# Altium PCB MACH LOC NUOC KAROFI V3 271015.PcbDoc (part 2 of 2)
Units mil, origin at the board's own origin, x right, y up, seen from the top; angles counter-clockwise.
Board outline 2986 x 2286 mil, 2 copper layers (Top Layer, Bottom Layer); 83 components, 86 nets, 303 pads, 107 vias.
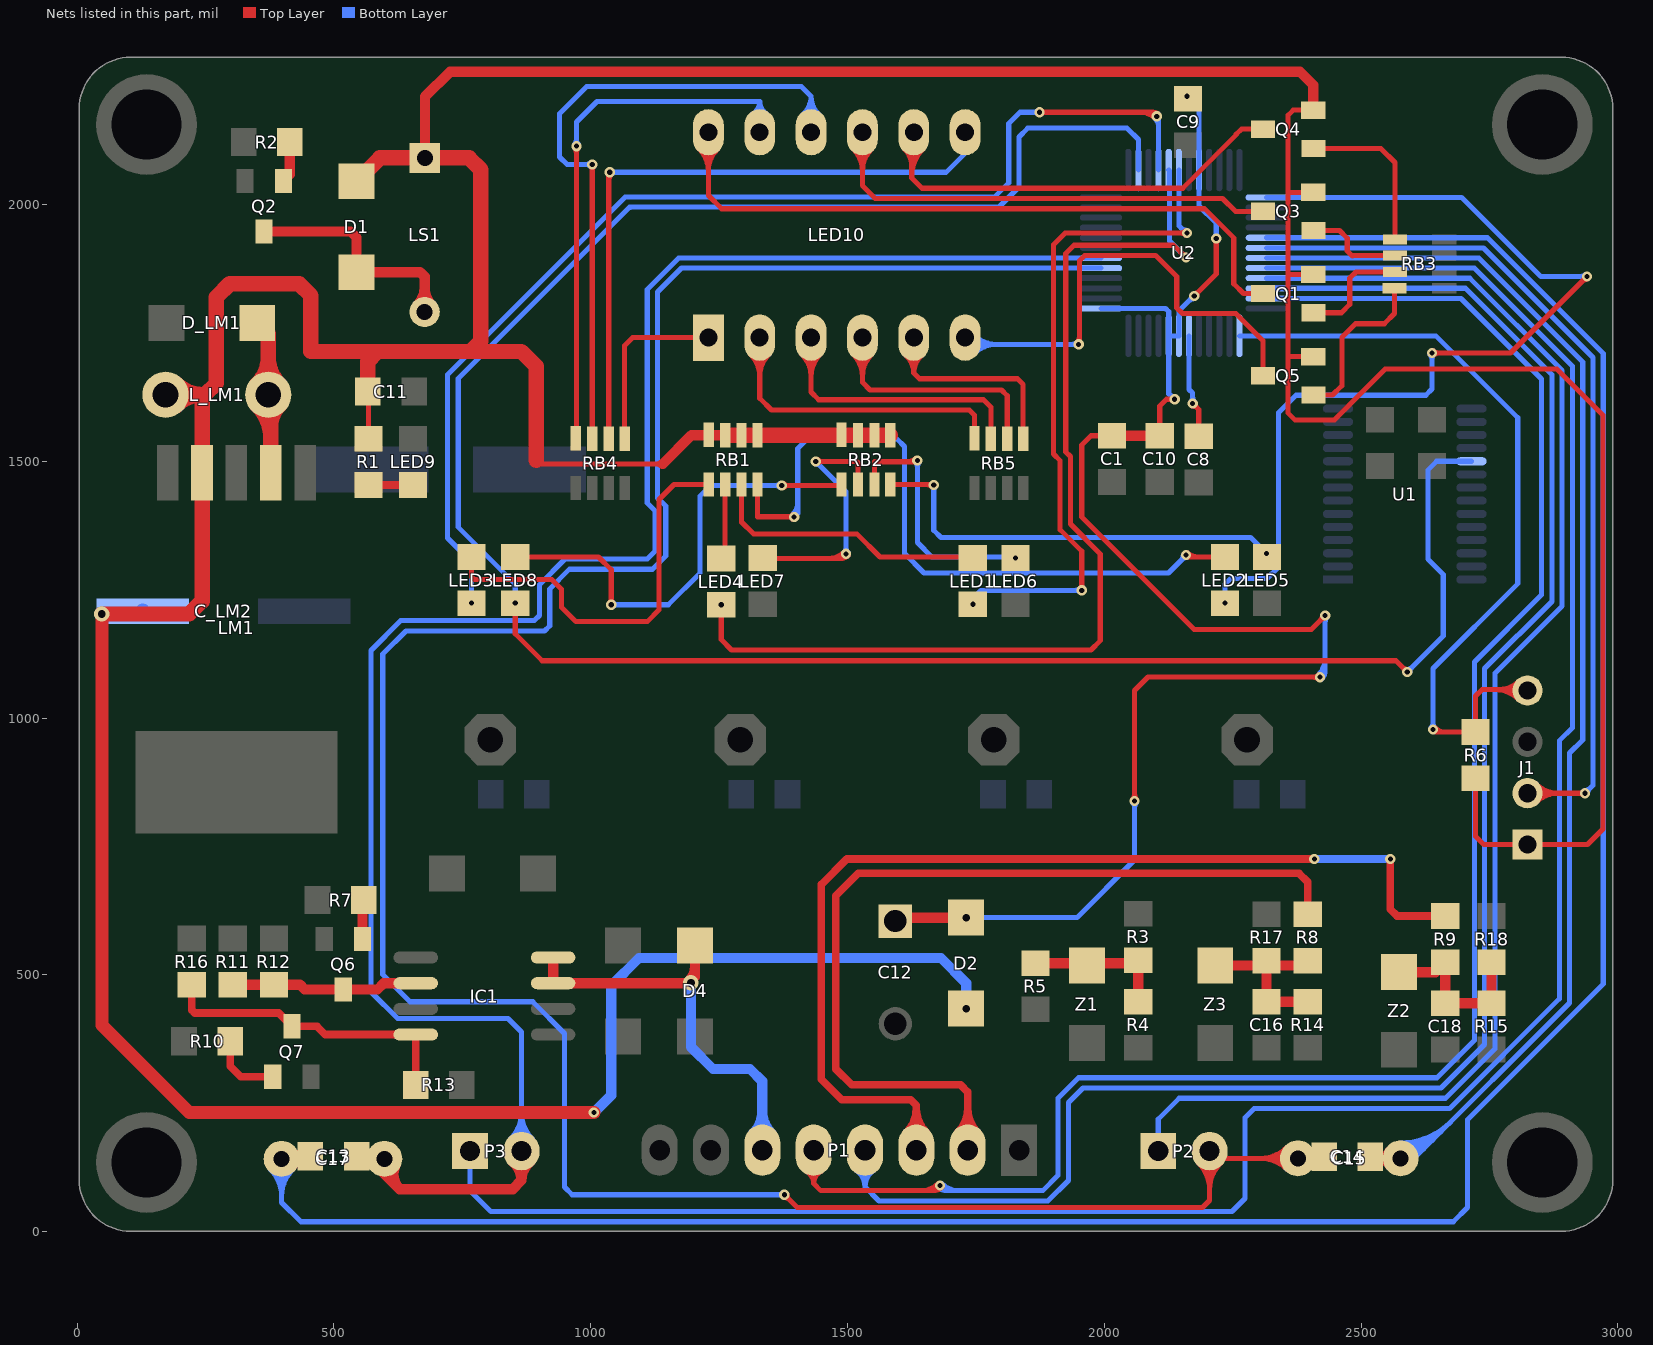
[diagram p2: the nets of this part, all layers, seen from the top]

## Via types
v1: diameter 20, hole 10, Top Layer to Bottom Layer, tented both sides, 92 vias
v2: diameter 30, hole 15, Top Layer to Bottom Layer, tented both sides, 15 vias

## Nets (pads, with @x,y where several pads share a name; then routed paths per layer and width w, separated by ;. In a path a pad name is that pad's centre, name@x,y a point inside that pad or via, vN(x,y) a via of type N, cw(c..) or ccw(c..) an arc to the next point about the centre after c; other vN are vias at no path point) (continued)
KEY4: LED8.2 U1.19 U2.26 | length 4565.5
  Top Layer w10: LED8.2@849.46,1220.46 cw(c840.93,1211.93) 853,1211.93 cw(c865.07,1211.93) LED8.2@856.54,1220.46 ; v1(853,1224) 853,1164.43 905.43,1112 2568,1112 v1(2590,1090) ; v1@2585,1090 ccw(c2572.93,1090) 2581.46,1098.54 ccw(c2590,1107.07) v1@2590,1095
  Bottom Layer w10: v1@849.46,1227.54 ccw(c840.93,1236.07) 853,1236.07 ccw(c865.07,1236.07) v1@856.54,1227.54 ; v1(853,1224) 853,1261 742,1372 742,1661.71 1075.29,1995 1076.92,1995 1077.14,1995.21 1794.78,1995.21 1834,2034.43 1834,2132 1851,2149 2044.42,2149 2066.42,2127 U2.26@2066.42,2067.42 ; v1(2590,1090) 2660,1160 2660,1280 2630,1310 2630,1430 2630,1483 2647.32,1500.32 U1.19@2714.84,1500.32 ; v1@2590,1095 ccw(c2590,1107.07) 2598.54,1098.54 ccw(c2607.07,1090) v1@2595,1090
LED1: Q1.1 RB3.3 | length 221.6
  Top Layer w10: Q1.1@2407.21,1789.6 2461.6,1789.6 2478,1806 2478,1857 2490,1869 RB3.3@2566,1869
LED2: Q3.1 RB3.2 | length 194.2
  Top Layer w10: Q3.1@2407.21,1949.6 2458,1949.6 2473,1934.6 2473,1910 2483,1900 2484,1901 RB3.2@2566,1901
LED3: Q4.1 RB3.1 | length 320.2
  Top Layer w10: Q4.1@2407.21,2109.6 2538.4,2109.6 2566,2082 RB3.1@2566,1932
LED4: Q5.1 RB3.4 | length 327.5
  Top Layer w10: Q5.1@2407.21,1629.6 2444.6,1629.6 2462.5,1647.5 2462.5,1741.5 2489,1768 2545,1768 2565,1788 RB3.4@2565,1837
MCU_L1: LED2.2 U2.37 | length 1989.7
  Top Layer w10: v1(2638,1711) 2791,1711 v1(2940,1860) ; v1@2641.54,1707.46 cw(c2650.07,1698.93) 2650.07,1711 cw(c2650.07,1723.07) v1@2641.54,1714.54 ; v1@2935,1860 cw(c2922.93,1860) 2931.46,1851.46 cw(c2940,1842.93) v1@2940,1855
  Bottom Layer w10: v1@2231.46,1227.54 ccw(c2222.93,1236.07) 2235,1236.07 ccw(c2247.07,1236.07) v1@2238.54,1227.54 ; v1(2235,1224) 2235,1261 2246,1272 2317,1272 2339,1294 2339,1595 2373,1629 2626,1629 2638,1641 v1(2638,1711) ; U2.37@2316.42,2014.27 2695.73,2014.27 2850,1860 v1(2940,1860) ; v1@2634.46,1707.46 cw(c2625.93,1698.93) 2638,1698.93 cw(c2650.07,1698.93) v1@2641.54,1707.46 ; v1@2936.46,1856.46 ccw(c2927.93,1847.93) 2927.93,1860 ccw(c2927.93,1872.07) v1@2936.46,1863.54
MCU_L2: LED1.2 U2.30 | length 1439.3
  Top Layer w10: v1@1952.46,1252.54 ccw(c1943.93,1261.07) 1956,1261.07 ccw(c1968.07,1261.07) v1@1959.54,1252.54 ; v1(1956,1249) 1956,1325 1914,1367 1914,1501.28 1901,1514.28 1901,1922 1924,1945 v1(2161,1945) ; v1@2157.46,1941.46 ccw(c2148.93,1932.93) 2148.93,1945 ccw(c2148.93,1957.07) v1@2157.46,1948.54
  Bottom Layer w10: v1@1739,1221.95 cw(c1753.25,1222.1) 1743.17,1232.17 ; v1(1744,1222) 1744,1233 1760,1249 ; v1@1749,1222.05 cw(c1786.56,1222.44) 1760,1249 ; v1@1952.46,1245.46 ccw(c1943.93,1236.93) 1943.93,1249 ccw(c1943.93,1261.07) v1@1952.46,1252.54 ; v1(1956,1249) 1760,1249 ; U2.30@2145.16,2067.42 2145.16,1958.84 2161,1943 v1(2161,1945) ; 2149.05,1954.95 ccw(c2161,1966.9) v1@2161,1950
MCU_L3: LED4.2 U2.29 | length 2095.2
  Top Layer w10: LED4.2@1250.46,1217.46 cw(c1241.93,1208.93) 1254,1208.93 cw(c1266.07,1208.93) LED4.2@1257.54,1217.46 ; v1(1254,1221) 1254,1153 1274,1133 1974,1133 1992,1151 1992,1320 1934,1378 1934,1509.57 1925,1518.57 1925,1905 1941,1921 2135,1921 v1(2159,1897) ; v1@2154,1897 ccw(c2141.93,1897) 2150.46,1905.54 ccw(c2159,1914.07) v1@2159,1902
  Bottom Layer w10: U2.29@2125.47,2067.42 2127,2065.89 2127,1929 v1(2159,1897) ; v1@2154,1897 ccw(c2141.93,1897) 2150.46,1905.54 ccw(c2159,1914.07) v1@2159,1902
MCU_L4: LED3.2 U2.28 | length 2353.5
  Top Layer w10: v1(1874,2180) 2094,2180 v1(2102,2172) ; v1@1877.54,2176.46 cw(c1886.07,2167.93) 1886.07,2180 cw(c1886.07,2192.07) v1@1877.54,2183.54 ; 2070.62,2180 cw(c2070.62,2140.62) v1@2098.46,2168.46 ; 2094.76,2180 cw(c2094.76,2164.76) v1@2105.54,2175.54
  Bottom Layer w10: v1@764.46,1227.54 ccw(c755.93,1236.07) 768,1236.07 ccw(c780.07,1236.07) v1@771.54,1227.54 ; v1(768,1224) 768,1304 721,1351 721,1668.99 1067.01,2015 1068.64,2015 1068.85,2015.21 1786.5,2015.21 1814,2042.72 1814,2158 1836,2180 v1(1874,2180) ; v1@1870.46,2176.46 ccw(c1861.93,2167.93) 1861.93,2180 ccw(c1861.93,2192.07) v1@1870.46,2183.54 ; v1@2098.46,2168.46 cw(c2080.79,2150.79) 2105.79,2150.79 ; v1(2102,2172) 2105.79,2168.21 U2.28@2105.79,2067.42
NetC8_2: C8.2 U2.6 | length 241.4
  Top Layer w10: v1@2172,1608 cw(c2172,1595.93) 2180.54,1604.46 cw(c2189.07,1613) v1@2177,1613 ; v1(2172,1613) 2184,1601 C8.2@2184,1549
  Bottom Layer w10: U2.6@2164.84,1744.58 2164.84,1640.16 2172,1633 v1(2172,1613) ; v1@2168.46,1616.54 ccw(c2159.93,1625.07) 2172,1625.07 ccw(c2184.07,1625.07) v1@2175.54,1616.54
NetC16_1: C16.1 R8.2 R14.1 R17.2 Z3.2 | length 330.6
  Top Layer w20: Z3.2@2216,518.58 R17.2@2316,518.58 ; R17.2@2316,528 R17.2@2316,518.58 ; R8.2@2386.58,518.58 R17.2@2316,518.58 ; R14.1@2396,448 C16.1@2316,448 R17.2@2316,518.58
NetC18_1: C18.1 R9.2 R15.1 R18.2 Z2.2 | length 320.6
  Top Layer w20: Z2.2@2574,505.58 R9.2@2644.58,505.58 ; R9.2@2664,525 C18.1@2664,445 R15.1@2754,445 R18.2@2754,525
NetD1_1: D1.1 LS1.2 Q2.2 | length 531.2
  Top Layer w20: Q2.2@364,1947.79 532.21,1947.79 544,1936 D1.1@544,1868.42 667.58,1868.42 676.5,1859.5 LS1.2@676.5,1791 ; LS1.2@662.69,1804.81 ccw(c629.36,1838.14) 676.5,1838.14 ccw(c723.64,1838.14) LS1.2@690.31,1804.81
NetD_LM1_2: D_LM1.2 L_LM1.1 LM1.2 | length 530.4
  Top Layer w30: D_LM1.2@350.58,1770 372,1748.58 L_LM1.1@372,1630 376.93,1625.07 LM1.2@376.93,1478 ; L_LM1.1@350.79,1608.79 cw(c287.67,1545.67) 376.93,1545.67 ; L_LM1.1@350.79,1651.21 ccw(c299.57,1702.43) 372,1702.43 ccw(c444.43,1702.43) L_LM1.1@393.21,1651.21 ; 376.93,1569.47 cw(c432.53,1569.47) L_LM1.1@393.21,1608.79
NetIC1_2: IC1.2 Q6.2 R11.2 R12.1 | length 365
  Top Layer w20: R11.2@303,481 R12.1@383,481 434,481 443.21,471.79 Q6.2@518,471.79 584.79,471.79 597,484 IC1.2@659.14,484
NetIC1_4: IC1.4 Q7.2 R13.1 R16.1 | length 602.9
  Top Layer w15: R16.1@223,481 223,432 229,426 392.21,426 Q7.2@418,400.21 466.79,400.21 483,384 IC1.4@659.14,384 ; R13.1@659,286 IC1.4@659,383.86
NetLED1_1: LED1.1 RB1.7 | length 552.7
  Top Layer w10: 1293.67,1381.33 RB1.7@1293.67,1455 ; 1295.67,1381.33 1294.67,1381.33 1317,1359 1518,1359 1563,1314 1742,1314 LED1.1@1744,1312
NetLED2_1: LED2.1 RB1.8 | length 1445.8
  Top Layer w10: RB1.8@1324.67,1455 1324.67,1392.33 1393.67,1392.33 1396,1390 v1(1396,1392) ; 1383.12,1392.33 cw(c1383.12,1379.12) v1@1392.46,1388.46 ; 1384.73,1392.33 ccw(c1384.73,1403.27) v1@1392.46,1395.54 ; v1(2159,1318) 2163,1314 LED2.1@2235,1314 ; v1@2162.54,1321.54 ccw(c2180.73,1339.73) 2180.73,1314
  Bottom Layer w10: v1@1392.46,1395.54 ccw(c1367.03,1420.97) 1403,1420.97 ; v1(1396,1392) 1403,1399 1403,1525 1422,1544 1596,1544 1611,1529 1611,1321 1649,1283 2125,1283 2159,1317 v1(2159,1318) ; 2149.76,1307.76 ccw(c2139.51,1318) v1@2154,1318 ; 2152.17,1310.17 cw(c2159,1303.34) v1@2159,1313
NetLED3_1: LED3.1 RB1.5 | length 793.7
  Top Layer w10: LED3.1@768,1314 768,1275 773,1270 924,1270 943,1251 943,1216 971,1188 1110,1188 1133,1211 1133,1426 1162,1455 RB1.5@1229.67,1455
NetLED4_1: LED4.1 RB1.6 | length 125.7
  Top Layer w10: LED4.1@1261.67,1329.33 RB1.6@1261.67,1455
NetLED5_1: LED5.1 RB2.8 | length 889.8
  Top Layer w10: RB2.8@1583.33,1455 1667,1455 v1(1668,1454) ; 1653.51,1455 cw(c1653.51,1439.51) v1@1664.46,1450.46
  Bottom Layer w10: v1@1664.46,1450.46 cw(c1655.93,1441.93) 1668,1441.93 cw(c1680.07,1441.93) v1@1671.54,1450.46 ; v1(1668,1454) 1668,1366 1682,1352 2285,1352 v1(2316,1321) ; v1@2311,1321 ccw(c2298.93,1321) 2307.46,1329.54 ccw(c2316,1338.07) v1@2316,1326
NetLED6_1: LED6.1 RB2.7 | length 543
  Top Layer w10: RB2.7@1552.33,1455 1552.33,1499.33 1633.33,1499.33 v1(1636,1502) ; 1617.49,1499.33 ccw(c1617.49,1520.51) v1@1632.46,1505.54
  Bottom Layer w10: v1@1632.46,1498.46 cw(c1623.93,1489.93) 1636,1489.93 cw(c1648.07,1489.93) v1@1639.54,1498.46 ; v1(1636,1502) 1636,1342 1664,1314 1825,1314 v1(1827,1312) ; 1810.1,1314 cw(c1810.1,1295.1) v1@1823.46,1308.46
NetLED7_1: LED7.1 RB2.6 | length 601.3
  Top Layer w10: LED7.1@1335,1311 1488,1311 v1(1497,1320) ; v1(1438,1500) 1518,1500 1520.33,1497.67 RB2.6@1520.33,1455 ; v1@1441.54,1496.46 cw(c1450.07,1487.93) 1450.07,1500 cw(c1450.07,1512.07) v1@1441.54,1503.54 ; 1463.2,1311 ccw(c1463.2,1353.8) v1@1493.46,1323.54 ; 1487.34,1311 ccw(c1487.34,1329.66) v1@1500.54,1316.46
  Bottom Layer w10: v1@1438,1495 cw(c1438,1482.93) 1446.54,1491.46 cw(c1455.07,1500) v1@1443,1500 ; v1(1438,1500) 1497,1441 v1(1497,1320) ; v1@1493.46,1323.54 ccw(c1484.93,1332.07) 1497,1332.07 ccw(c1509.07,1332.07) v1@1500.54,1323.54
NetLED8_1: LED8.1 RB2.5 | length 995
  Top Layer w10: LED8.1@867,1300 LED8.1@853,1314 1015,1314 1040,1289 v1(1040,1221) ; v1@1036.46,1224.54 ccw(c1027.93,1233.07) 1040,1233.07 ccw(c1052.07,1233.07) v1@1043.54,1224.54 ; v1(1372,1453) 1484.33,1453 1487.33,1456 RB2.5@1488.33,1455 ; v1@1375.54,1449.46 cw(c1384.07,1440.93) 1384.07,1453 cw(c1384.07,1465.07) v1@1375.54,1456.54
  Bottom Layer w10: v1(1040,1221) 1151,1221 1213,1283 1213,1433 1233,1453 v1(1372,1453) ; v1@1043.54,1217.46 cw(c1052.07,1208.93) 1052.07,1221 cw(c1052.07,1233.07) v1@1043.54,1224.54 ; v1@1368.46,1449.46 ccw(c1359.93,1440.93) 1359.93,1453 ccw(c1359.93,1465.07) v1@1368.46,1456.54
NetLED9_1: LED9.1 R1.1 | length 87
  Top Layer w15: R1.1@567,1454 LED9.1@654,1454
NetLED10_1: LED10.1 RB4.1 | length 351.1
  Top Layer w10: RB4.1@1066,1544.12 1066,1726 1081,1741 LED10.1@1229,1741
NetLED10_2: LED10.2 RB5.4 | length 746.2
  Top Layer w10: LED10.2@1311.32,1708.32 cw(c1268.64,1665.64) 1329,1665.64 cw(c1389.36,1665.64) LED10.2@1346.68,1708.32 ; LED10.2@1318.39,1715.39 cw(c1292.79,1689.79) 1329,1689.79 cw(c1365.21,1689.79) LED10.2@1339.61,1715.39 ; LED10.2@1329,1741 1329,1623 1352,1600 1737,1600 1747,1590 RB5.4@1747,1545.12
NetLED10_3: LED10.3 RB5.3 | length 681.6
  Top Layer w10: LED10.3@1411.32,1708.32 cw(c1368.64,1665.64) 1429,1665.64 cw(c1489.36,1665.64) LED10.3@1446.68,1708.32 ; LED10.3@1418.39,1715.39 cw(c1392.79,1689.79) 1429,1689.79 cw(c1465.21,1689.79) LED10.3@1439.61,1715.39 ; LED10.3@1429,1741 1429,1635 1444,1620 1765,1620 1779,1606 RB5.3@1779,1544.12
NetLED10_4: LED10.4 RB5.2 | length 615.3
  Top Layer w10: LED10.4@1511.32,1708.32 cw(c1468.64,1665.64) 1529,1665.64 cw(c1589.36,1665.64) LED10.4@1546.68,1708.32 ; LED10.4@1518.39,1715.39 cw(c1492.79,1689.79) 1529,1689.79 cw(c1565.21,1689.79) LED10.4@1539.61,1715.39 ; LED10.4@1529,1741 1529,1654 1544,1639 1800,1639 1811,1628 RB5.2@1811,1544.12
NetLED10_5: LED10.5 RB5.1 | length 524.1
  Top Layer w10: LED10.5@1612.83,1706.94 cw(c1583.19,1672) 1629,1672 ; LED10.5@1619.3,1714.56 cw(c1601.51,1693.6) 1629,1693.6 cw(c1656.49,1693.6) LED10.5@1638.7,1714.56 ; LED10.5@1629,1741 1629,1672 ; LED10.5@1645.17,1706.94 ccw(c1674.81,1672) 1629,1672 ; RB5.1@1842,1544.12 1842,1650 1831,1661 1640,1661 1629,1672
NetLED10_6: LED10.6 Q5.2 | length 1122.3
  Top Layer w10: LED10.6@1729,1741 LED10.6@1742,1741 ; v1@1946.46,1731.54 ccw(c1933.1,1744.9) 1952,1744.9 ; v1(1950,1728) 1952,1730 1952,1891 1962,1901 2100,1901 2141,1860 2141,1799 2152,1788 2256,1788 2308.79,1735.21 Q5.2@2308.79,1667
  Bottom Layer w10: LED10.6@1729,1741 1742,1728 v1(1950,1728) ; LED10.6@1739.61,1717.39 cw(c1765.21,1691.79) 1765.21,1728 cw(c1765.21,1764.21) LED10.6@1739.61,1738.61 ; LED10.6@1746.68,1710.32 cw(c1789.36,1667.64) 1789.36,1728 cw(c1789.36,1788.36) LED10.6@1746.68,1745.68 ; v1@1946.46,1724.46 ccw(c1937.93,1715.93) 1937.93,1728 ccw(c1937.93,1740.07) v1@1946.46,1731.54
NetLED10_7: LED10.7 RB4.2 | length 1301.8
  Top Layer w10: RB4.2@1035,1544.12 1035,2061 v1(1037,2063) ; 1035,2046.1 cw(c1053.9,2046.1) v1@1040.54,2059.46
  Bottom Layer w10: v1(1037,2063) 1692,2063 1729,2100 LED10.7@1729,2141 ; v1@1040.54,2059.46 cw(c1049.07,2050.93) 1049.07,2063 cw(c1049.07,2075.07) v1@1040.54,2066.54
NetLED10_8: LED10.8 Q4.2 | length 964.8
  Top Layer w10: LED10.8@1611.32,2108.32 cw(c1578.3,2075.3) 1625,2075.3 ; 1625,2055.99 cw(c1699.01,2055.99) LED10.8@1646.68,2108.32 ; 1625,2080.13 cw(c1674.87,2080.13) LED10.8@1639.61,2115.39 ; LED10.8@1629,2141 1625,2137 1625,2052 1645,2032 2152.71,2032 2257,2136.29 2257,2137 2267,2147 Q4.2@2308.79,2147
NetLED10_9: LED10.9 Q3.2 | length 1056.2
  Top Layer w10: LED10.9@1511.32,2108.32 cw(c1468.64,2065.64) 1529,2065.64 cw(c1589.36,2065.64) LED10.9@1546.68,2108.32 ; LED10.9@1518.39,2115.39 cw(c1492.79,2089.79) 1529,2089.79 cw(c1565.21,2089.79) LED10.9@1539.61,2115.39 ; LED10.9@1529,2141 1529,2037 1554,2012 2230.28,2012 2255.28,1987 Q3.2@2308.79,1987
NetLED10_10: LED10.10 RB4.3 | length 1446.9
  Top Layer w10: v1@999.46,2074.46 cw(c990.93,2065.93) 1003,2065.93 cw(c1015.07,2065.93) v1@1006.54,2074.46 ; RB4.3@1003,1544.12 v1(1003,2078)
  Bottom Layer w10: v1@999.46,2074.46 ccw(c990.93,2065.93) 990.93,2078 ccw(c990.93,2090.07) v1@999.46,2081.54 ; v1(1003,2078) 954,2078 939,2093 939,2177 992,2230 1410,2230 1429,2211 ; LED10.10@1412.56,2174.84 ccw(c1381.01,2211) 1429,2211 ; LED10.10@1419.14,2167.3 ccw(c1400.2,2189) 1429,2189 ccw(c1457.8,2189) LED10.10@1438.86,2167.3 ; LED10.10@1429,2141 1429,2211 ; LED10.10@1445.44,2174.84 cw(c1476.99,2211) 1429,2211
NetLED10_11: LED10.11 RB4.4 | length 1148.8
  Top Layer w10: v1@968.46,2110.46 cw(c959.93,2101.93) 972,2101.93 cw(c984.07,2101.93) v1@975.54,2110.46 ; RB4.4@971,1545.12 972,1546.12 v1(972,2114)
  Bottom Layer w10: v1@968.46,2117.54 ccw(c959.93,2126.07) 972,2126.07 ccw(c984.07,2126.07) v1@975.54,2117.54 ; v1(972,2114) 972,2161 1012,2201 1329,2201 ; LED10.11@1315.79,2177.23 ccw(c1301,2201) 1329,2201 ; LED10.11@1332,2144 LED10.11@1329,2141 1329,2201 ; LED10.11@1342.21,2177.23 cw(c1357,2201) 1329,2201
NetLED10_12: LED10.12 Q1.2 | length 1485.9
  Top Layer w10: LED10.12@1211.32,2108.32 cw(c1168.64,2065.64) 1229,2065.64 cw(c1289.36,2065.64) LED10.12@1246.68,2108.32 ; LED10.12@1218.39,2115.39 cw(c1192.79,2089.79) 1229,2089.79 cw(c1265.21,2089.79) LED10.12@1239.61,2115.39 ; LED10.12@1229,2141 1229,2018 1255,1992 2195.36,1992 2252,1935.36 2252,1846 2271,1827 Q1.2@2308.79,1827
NetQ2_1: Q2.1 R2.1 | length 81
  Top Layer w20: Q2.1@401.4,2046.21 414,2058.81 R2.1@414,2122
NetQ6_1: Q6.1 R7.1 | length 73.2
  Top Layer w20: Q6.1@555.4,570.21 R7.1@555.4,643.4
NetQ7_1: Q7.1 R10.1 | length 140
  Top Layer w15: R10.1@298,371 298,322 318.21,301.79 Q7.1@380.6,301.79
NetR3_1: R3.1 R4.1 R5.1 Z1.2 | length 283.5
  Top Layer w20: R5.1@1866,523 2060,523 R3.1@2066,529 R4.1@2066,448
RESET: J1.4 R6.2 U2.1 | length 1735.4
  Top Layer w10: v1(2640,978) 2645,973 R6.2@2723,973 2723,1043 2736,1056 2822,1056 J1.4@2824,1054 ; v1@2643.54,981.54 ccw(c2664.14,1002.14) 2664.14,973 ; 2759.96,1056 cw(c2759.96,989.96) J1.4@2806.66,1036.66 ; 2769.61,1056 ccw(c2769.61,1108.39) J1.4@2806.66,1071.34 ; 2784.1,1056 cw(c2784.1,1014.1) J1.4@2813.73,1043.73 ; 2793.76,1056 ccw(c2793.76,1084.24) J1.4@2813.73,1064.27
  Bottom Layer w10: U2.1@2263.27,1744.58 2645.42,1744.58 2805,1585 2805,1262 2640,1097 v1(2640,978) ; v1@2636.46,981.54 ccw(c2627.93,990.07) 2640,990.07 ccw(c2652.07,990.07) v1@2643.54,981.54
RX_MCU: P1.5 U2.47 | length 3681.6
  Top Layer w10: P1.5@1419.88,117.53 cw(c1407.34,94) 1434,94 ; P1.5@1434,159 1434,94 ; P1.5@1448.12,117.53 ccw(c1460.66,94) 1434,94 ; 1643.79,80 ccw(c1643.79,126.21) v1@1676.46,93.54 ; 1667.93,80 ccw(c1667.93,102.07) v1@1683.54,86.46 ; v1(1680,90) 1670,80 1448,80 1434,94
  Bottom Layer w10: v1@1676.46,86.46 ccw(c1692.07,102.07) 1692.07,80 ; v1(1680,90) 1690,80 1880,80 1910,110 1910,260 1950,300 2647.58,300 2720.57,372.99 2720.57,1109.57 2851.5,1240.5 2851.5,1660.51 2694.59,1817.42 U2.47@2316.42,1817.42 ; v1@1683.54,93.54 ccw(c1716.21,126.21) 1716.21,80
SWIM: J1.2 U2.42 | length 1879.7
  Top Layer w10: J1.2@2824,854 2828,858 2832,854 v1(2936,854) ; J1.2@2834.27,843.73 cw(c2859.07,818.93) 2859.07,854 cw(c2859.07,889.07) J1.2@2834.27,864.27 ; J1.2@2841.34,836.66 cw(c2883.21,794.79) 2883.21,854 cw(c2883.21,913.21) J1.2@2841.34,871.34 ; v1@2932.46,850.46 ccw(c2923.93,841.93) 2923.93,854 ccw(c2923.93,866.07) v1@2932.46,857.54
  Bottom Layer w10: U2.42@2316.42,1915.84 2738.16,1915.84 2951.5,1702.5 2951.5,869.5 v1(2936,854) ; v1@2936,859 ccw(c2936,871.07) 2944.54,862.54 ccw(c2953.07,854) v1@2941,854
TDS1_MCU: C13.2 C17.2 P3.2 U2.18 | length 4173.1
  Top Layer w10: C17.2@571.28,128.36 ccw(c549,116.99) C13.2@549,142 ; C17.2@571.28,155.64 cw(c549,167.01) C13.2@549,142 ; C17.2@594.46,138.46 ccw(c585.93,129.93) 585.93,142 ccw(c585.93,154.07) C17.2@594.46,145.54 ; C17.2@598,142 C13.2@549,142
  Top Layer w20: C17.2@598,142 598,113 628,83 ; C17.2@602.47,139.75 ccw(c631.17,125.29) 608.44,102.56 ; C17.2@620.33,130.75 ccw(c657.18,112.18) 628,83 ; P3.2@848.69,135.55 cw(c818.1,100) 865,100 ; P3.2@865,157 865,100 ; P3.2@881.31,135.55 ccw(c911.9,100) 865,100 ; 628,83 848,83 865,100
  Bottom Layer w10: P3.2@843.79,180.71 ccw(c792.57,231.93) 865,231.93 ccw(c937.43,231.93) P3.2@886.21,180.71 ; P3.2@850.86,173.64 ccw(c816.72,207.78) 865,207.78 ccw(c913.28,207.78) P3.2@879.14,173.64 ; P3.2@865,157 865,389 839,415 624,415 572,467 572,1132 630,1190 890,1190 900,1200 900,1260 950,1310 1110,1310 1125,1325 1125,1404 1110,1419 1110,1835 1171.16,1896.16 U2.18@1993.58,1896.16
TDS2_MCU: C13.1 C17.1 U2.41 | length 5243
  Top Layer w10: C17.1@398,142 C13.1@449,142 ; C17.1@424.22,127.43 cw(c449,113.65) C13.1@449,142 ; C17.1@424.22,156.57 ccw(c449,170.35) C13.1@449,142
  Bottom Layer w10: C17.1@376.79,120.79 cw(c325.57,69.57) 398,69.57 cw(c470.43,69.57) C17.1@419.21,120.79 ; C17.1@383.86,127.86 cw(c349.72,93.72) 398,93.72 cw(c446.28,93.72) C17.1@412.14,127.86 ; C17.1@398,142 398,57 435.5,19.5 2679.5,19.5 2707,47 2707,218 2971.5,482.5 2971.5,1710.22 2746.19,1935.53 U2.41@2316.42,1935.53
TDS3_MCU: P3.1 U2.44 | length 4394.9
  Bottom Layer w10: P3.1@765,157 765,79.93 805.43,39.5 2248.5,39.5 2274,65 2274,222 2292,240 2672.43,240 2886,453.57 2886,956 2911.5,981.5 2911.5,1685.36 2720.39,1876.47 U2.44@2316.42,1876.47
TDS4_MCU: C14.2 C15.2 P2.2 U2.17 | length 5504.1
  Top Layer w10: v1@1377,67 cw(c1377,54.93) 1385.54,63.46 cw(c1394.07,72) v1@1382,72 ; v1(1377,72) 1402,47 2191,47 2205,61 P2.2@2205,157 2219,143 C15.2@2377,143 2380,146 C14.2@2428,146 ; P2.2@2183.79,133.29 cw(c2132.57,82.07) 2205,82.07 cw(c2277.43,82.07) P2.2@2226.21,133.29 ; P2.2@2190.86,140.36 cw(c2156.72,106.22) 2205,106.22 cw(c2253.28,106.22) P2.2@2219.14,140.36 ; C15.2@2355.79,121.79 ccw(c2304.57,70.57) 2304.57,143 ccw(c2304.57,215.43) C15.2@2355.79,164.21 ; C15.2@2362.86,128.86 ccw(c2328.72,94.72) 2328.72,143 ccw(c2328.72,191.28) C15.2@2362.86,157.14 ; C15.2@2395.24,134.81 cw(c2412.54,127.03) C14.2@2412.54,146 ; C15.2@2401.81,159.86 ccw(c2428,177.66) C14.2@2428,146 ; C15.2@2404.37,130.71 cw(c2428,120.09) C14.2@2428,146
  Bottom Layer w10: v1@1373.46,68.46 ccw(c1364.93,59.93) 1364.93,72 ccw(c1364.93,84.07) v1@1373.46,75.54 ; v1(1377,72) 964,72 949,87 949,386 887,448 648,448 595,501 595,1125 640,1170 910,1170 920,1180 920,1251.72 958.28,1290 1120,1290 1146,1316 1146,1413 1130,1429 1130,1830 1176.47,1876.47 U2.17@1993.58,1876.47
TDS5_MCU: C14.1 C15.1 U2.43 | length 2906.7
  Top Layer w10: C15.1@2552.02,126.38 ccw(c2521,105.74) C14.1@2521,143 ; C15.1@2552.02,159.62 cw(c2521,180.26) C14.1@2521,143 ; C15.1@2560.35,131.92 ccw(c2539.67,118.16) 2539.67,143 ccw(c2539.67,167.84) C15.1@2560.35,154.08 ; C15.1@2577,143 C14.1@2521,143
  Bottom Layer w10: U2.43@2316.42,1896.16 2728.99,1896.16 2931.5,1693.65 2931.5,957.5 2906,932 2906,445.28 2603.72,143 C15.1@2577,143 ccw(c2577,207.5) 2622.61,161.89 ; C15.1@2577,153 ccw(c2577,241.64) 2639.68,178.96 ; C15.1@2577,163 ccw(c2577,275.78) 2656.75,196.03 ; C15.1@2577,173 ccw(c2577,309.92) 2673.82,213.1
TDS6_MCU: P2.1 U2.45 | length 2798.9
  Bottom Layer w10: P2.1@2105,157 2105,219 2146,260 2664.15,260 2760.57,356.43 2760.57,1087.57 2891.5,1218.5 2891.5,1677.08 2711.79,1856.79 U2.45@2316.42,1856.79
TX_MCU: P1.4 U2.46 | length 3612.3
  Bottom Layer w10: P1.4@1517.17,119.16 cw(c1495.67,87.43) 1534,87.43 ; P1.4@1522.78,127.44 cw(c1508.45,106.29) 1534,106.29 cw(c1559.55,106.29) P1.4@1545.22,127.44 ; P1.4@1534,159 1534,87.43 ; P1.4@1550.83,119.16 ccw(c1572.33,87.43) 1534,87.43 ; U2.46@2316.42,1837.1 2703.19,1837.1 2871.5,1668.79 2871.5,1227.5 2740.57,1096.57 2740.57,364.71 2655.86,280 1958.28,280 1930,251.72 1930,100 1890,60 1561.43,60 1534,87.43
VAN_CAO_AP: P1.3 R9.1 | length 2115.5
  Top Layer w15: P1.3@1614.55,193.45 ccw(c1567.61,240.39) 1634,240.39 ccw(c1700.39,240.39) P1.3@1653.45,193.45 ; P1.3@1634,159 1634,246 1623,257 1489,257 1449,297 1449,676 1499,726 v1(2409,726) ; v1(2557,726) 2557,628 2570,615 R9.1@2664,615
  Bottom Layer w15: v1(2409,726) v1(2557,726)
VAN_THAP_AP: P1.2 R8.1 | length 1837.2
  Top Layer w15: P1.2@1714.55,193.45 ccw(c1667.61,240.39) 1734,240.39 ccw(c1800.39,240.39) P1.2@1753.45,193.45 ; P1.2@1734,159 1734,272 1720,286 1508,286 1477,317 1477,654 1521,698 2379,698 2396,681 R8.1@2396,618
VAN_XA: D4.1 IC1.7 IC1.8 P1.6 | length 927.2
  Top Layer w20: IC1.8@926.86,534 IC1.7@926.86,484 v2@1191,484 ; v2@1191.46,488.54 ccw(c1163.62,516.38) 1203,516.38 ; v2@1203,496 D4.1@1203,557.58
  Bottom Layer w20: v2(1195,485) 1195,360 1238,317 1310,317 1334,293 P1.6@1334,159 ; P1.6@1316.32,191.68 ccw(c1273.64,234.36) 1334,234.36 ccw(c1394.36,234.36) P1.6@1351.68,191.68
VCC: C11.2 C_LM2.1 D1.2 D2.1 J1.1 L_LM1.2 LM1.4 LS1.1 Q1.3 Q3.3 Q4.3 Q5.3 R1.2 R6.1 RB1.1 RB1.2 RB1.3 RB1.4 RB2.1 RB2.2 RB2.3 RB2.4 | length 11056.6
  Top Layer w10: C11.2@566,1636 567,1635 R1.2@567,1544 ; 894,1502 901,1495 1140,1495 ; 1136.46,1491.46 ccw(c1127.93,1482.93) 1127.93,1495 ccw(c1127.93,1507.07) 1136.46,1498.54 ; 2359,2024 Q3.3@2407,2024 ; 2360,1864 Q1.3@2407,1864 ; Q4.3@2403.46,2180.46 ccw(c2394.93,2171.93) 2394.93,2184 ccw(c2394.93,2196.07) Q4.3@2403.46,2187.54 ; Q5.3@2407,1704 2361,1704 2358,1707 ; Q4.3@2407,2184 2368,2184 2358,2174 2358,1707 ; R6.1@2723,883 2723,770 2739,754 J1.1@2824,754 2941,754 2971,784 2971,1590 2881,1680 2547,1680 2448,1581 2371,1581 2358,1594 2358,1707
  Top Layer w20: LS1.1@677,2091 677,2210 726,2259 2381,2259 2407,2233 Q4.3@2407,2184 ; 1140,1495 1196,1551 RB1.3@1261.67,1551
  Top Layer w25: v2(48,1203) 48,402 218,232 v1(1006,232)
  Top Layer w30: v2(48,1203) 218,1203 243.07,1228.07 LM1.4@243.07,1478 243.07,1624.07 249,1630 ; L_LM1.2@172,1630 249,1630 ; L_LM1.2@193.21,1608.79 cw(c244.43,1557.57) 244.43,1630 cw(c244.43,1702.43) L_LM1.2@193.21,1651.21 ; D1.2@544,2045.58 589.42,2091 LS1.1@677,2091 763,2091 786,2068 786,1734 766,1714 ; C11.2@566,1636 566,1695 585,1714 ; 894,1502 894,1685 865,1714 766,1714 ; RB1.3@1261.67,1551 RB1.2@1293.67,1551 RB1.1@1324.67,1551 RB2.3@1520.33,1551 RB2.2@1552.33,1551 RB2.1@1583.33,1551 ; 249,1630 271,1652 271,1820 297,1846 432,1846 455,1823 455,1714 585,1714 ; 585,1714 766,1714
  Bottom Layer w20: v1(1006,232) 1040,266 1040,479 1094,533 1682,533 1731,484 v2(1731,434.42)
  Bottom Layer w30: v2(48,1203) 122.2,1203 C_LM2.1@127.31,1208.11
VCC_MCU: C1.2 C9.1 C10.1 C12.1 D2.2 U2.7 U2.8 U2.13 U2.32 | length 3517
  Top Layer w10: C1.2@2011.46,1546.46 ccw(c2002.93,1537.93) 2002.93,1550 ccw(c2002.93,1562.07) C1.2@2011.46,1553.54 ; C1.2@2015,1550 1974,1550 1956,1532 1956,1392 2175,1173 2403,1173 v1(2430,1200) ; v1@2055.46,842.54 ccw(c2046.93,851.07) 2059,851.07 ccw(c2071.07,851.07) v1@2062.54,842.54 ; v1(2059,839) 2059,1054 2085,1080 v1(2420,1080) ; C10.1@2104.46,1553.54 ccw(c2095.93,1562.07) 2108,1562.07 ccw(c2120.07,1562.07) C10.1@2111.54,1553.54 ; C10.1@2108,1550 2108,1608 2121,1621 v1(2137,1621) ; v1@2133.46,1617.46 ccw(c2124.93,1608.93) 2124.93,1621 ccw(c2124.93,1633.07) v1@2133.46,1624.54 ; v1(2175,1822) 2218,1865 v1(2218,1934) ; v1@2175,1827 ccw(c2175,1839.07) 2183.54,1830.54 ccw(c2192.07,1822) v1@2180,1822 ; v1@2214.46,1930.46 cw(c2205.93,1921.93) 2218,1921.93 cw(c2230.07,1921.93) v1@2221.54,1930.46 ; v1@2416.46,1076.46 ccw(c2407.93,1067.93) 2407.93,1080 ccw(c2407.93,1092.07) v1@2416.46,1083.54 ; v1@2425,1200 cw(c2412.93,1200) 2421.46,1191.46 cw(c2430,1182.93) v1@2430,1195
  Top Layer w20: C12.1@1593,605 1599.58,611.58 v2(1731,611.58) ; C1.2@2015,1550 C10.1@2108,1550
  Bottom Layer w10: v2(1731,611.58) 1946.58,611.58 2059,724 v1(2059,839) ; v2@1738.07,604.51 cw(c1755.14,587.44) 1755.14,611.58 cw(c1755.14,635.73) v2@1738.07,618.65 ; U2.13@1993.58,1797.73 1993.58,1797.92 2119.08,1797.92 2125.47,1791.53 U2.8@2125.47,1744.58 ; v1@2055.46,835.46 cw(c2046.93,826.93) 2059,826.93 cw(c2071.07,826.93) v1@2062.54,835.46 ; 2126.76,1630.24 ccw(c2137,1640.49) v1@2137,1626 ; 2129.17,1627.83 cw(c2122.34,1621) v1@2132,1621 ; v1(2137,1621) 2136,1621 2125.47,1631.53 U2.8@2125.47,1744.58 ; v1@2161,2206 cw(c2161,2196.34) 2167.83,2203.17 ; v1(2161,2211) 2161,2210 2184.53,2186.47 U2.32@2184.53,2067.42 2184.53,1997.47 2218,1964 v1(2218,1934) ; 2164.76,1812.76 cw(c2175,1802.51) v1@2175,1817 ; v1@2166,2211 ccw(c2180.49,2211) 2170.24,2200.76 ; 2167.17,1815.17 ccw(c2160.34,1822) v1@2170,1822 ; v1(2175,1822) 2174,1822 2145.16,1793.16 U2.7@2145.16,1744.58 U2.8@2125.47,1744.58 ; v1@2214.46,1937.54 ccw(c2205.93,1946.07) 2218,1946.07 ccw(c2230.07,1946.07) v1@2221.54,1937.54 ; v1@2416.46,1083.54 ccw(c2383.79,1116.21) 2430,1116.21 ; v1(2420,1080) 2430,1090 v1(2430,1200) ; v1@2423.54,1076.46 ccw(c2407.93,1092.07) 2430,1092.07 ; v1@2426.46,1196.46 cw(c2417.93,1187.93) 2430,1187.93 cw(c2442.07,1187.93) v1@2433.54,1196.46
pads on no net: U1.1 U1.2 U1.3 U1.4 U1.5 U1.10 U1.13 U1.14 U1.20 U1.21 U1.22 U1.23 U1.24 U1.25 U1.26 U1.27 U1.28 U2.38 U2.39 U2.40

## Polygon pours and split planes (outlines as drawn)
GND on Bottom Layer "bot" (hatched 90Degree grid 20 track 8, remove dead copper, pour order 5): 2626,2287 2990,2287 2990,2009 2990,1 1376,1 4,1 4,1323 4,2287 207,2287
GND on Top Layer "bot" (hatched 90Degree grid 20 track 8, remove dead copper, pour order 7): 206,2287 4,2287 4,2132 4,1 282,1 2990,1 2990,1455 2990,2287 2751,2287

## Keep-outs
Keep-Out Layer:
  lines w7: 4,101 ccw(c104,101) 104,1 140,1 2795,1 2890,1 ccw(c2890,101) 2990,101 2990,175 2990,2107 2990,2187 ccw(c2890,2187) 2890,2287 2842,2287 186,2287 104,2287 ccw(c104,2187) 4,2187 4,2002 4,164 4,101

## Other copper
Top Layer:
  rectangle net GND: 608,412 744,455
  rectangle net GND: 615,512 751,555
  rectangle net GND: 736,365 858,565

## Silkscreen, mask and mechanical layers (free items; w line width, h text height)
Bottom Overlay:
  lines w10: 619,414 1044,414 ; 619,489 1044,489 ; 619,564 1044,564 ; 619,639 1044,639 ; 619,714 1044,714 ; 969,339 969,789 ; 1930,423 2355,423 ; 1930,498 2355,498 ; 1930,573 2355,573 ; 1930,648 2355,648 ; 1930,723 2355,723 ; 2290,348 2290,798 2295,798 ; 619,339 1044,339 1044,789 619,789 619,339 ; 1930,348 2355,348 2355,798 1930,798 1930,348
  text "RST" at 2734,1019 h80
  text "GND" at 2739,914 h80
  text "SWIM" at 2739,809 h80
  text "GND" at 2280,742 h60
  text "1" at 2330,738 h60
  text "BƠM" at 949,729 h60
  text "7" at 1019,729 h60
  text "5V" at 2734,719 h80
  text "2" at 2330,668 h60
  text "THẤP ÁP" at 2280,663 h60
  text "24VDC" at 949,659 h60
  text "8" at 1019,659 h60
  text "3" at 2330,593 h60
  text "CAO ÁP" at 2280,588 h60
  text "TDSI1" at 949,584 h60
  text "9" at 1019,584 h60
  text "TX_MCU" at 2280,519 h60
  text "4" at 2330,518 h60
  text "TDSI2" at 949,509 h60
  text "10" at 1029,509 h60
  text "RX_MCU" at 2280,438 h60
  text "5" at 2330,438 h60
  text "TDSO1" at 949,434 h60
  text "11" at 1029,434 h60
  text "6" at 2330,368 h60
  text "VAN XẢ" at 2275,364 h60
  text "TDSO2" at 949,359 h60
  text "12" at 1029,359 h60
  text "10" at 2139.04,221.9 h80
  text "9" at 2244.04,221.9 h80
  text "12" at 804.04,220 h80
  text "11" at 909.04,220 h80
  text "8" at 1159.04,220 h80
  text "7" at 1259.04,220 h80
  text "6" at 1364.04,220 h80
  text "5" at 1454.04,220 h80
  text "4" at 1559.04,220 h80
  text "3" at 1659.04,220 h80
  text "2" at 1759.04,220 h80
  text "1" at 1854.04,220 h80

## Text inside footprints (layer, text, board x,y; h text height)
C12: Bottom Overlay "+" at 1623,665 h80 r270
LS1: Bottom Overlay "+" at 705,2035.5 h60 r90